# Altium PCB MG_V4(1).PcbDoc
Units mm, origin at the board's own origin, x right, y up, seen from the top; angles counter-clockwise.
Board outline 99.69 x 61.59 mm, 2 copper layers (Top Layer, Bottom Layer); 89 components, 106 nets, 399 pads, 95 vias.
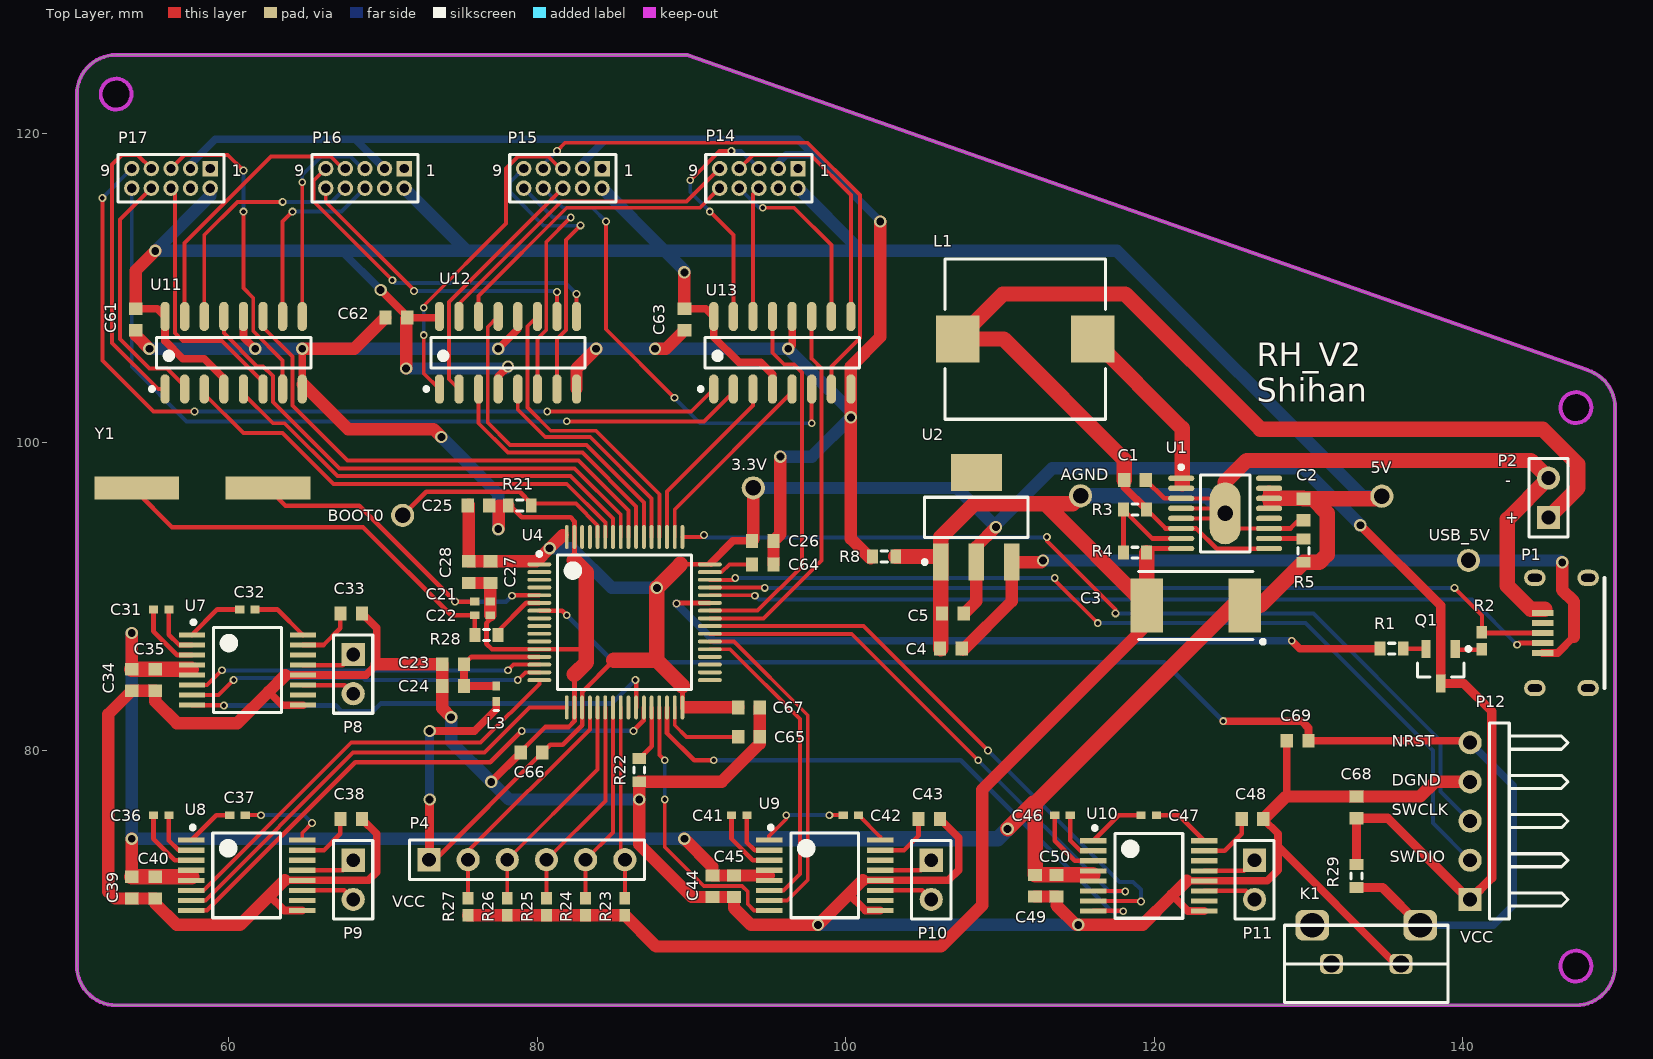
[diagram p0: Top Layer view]
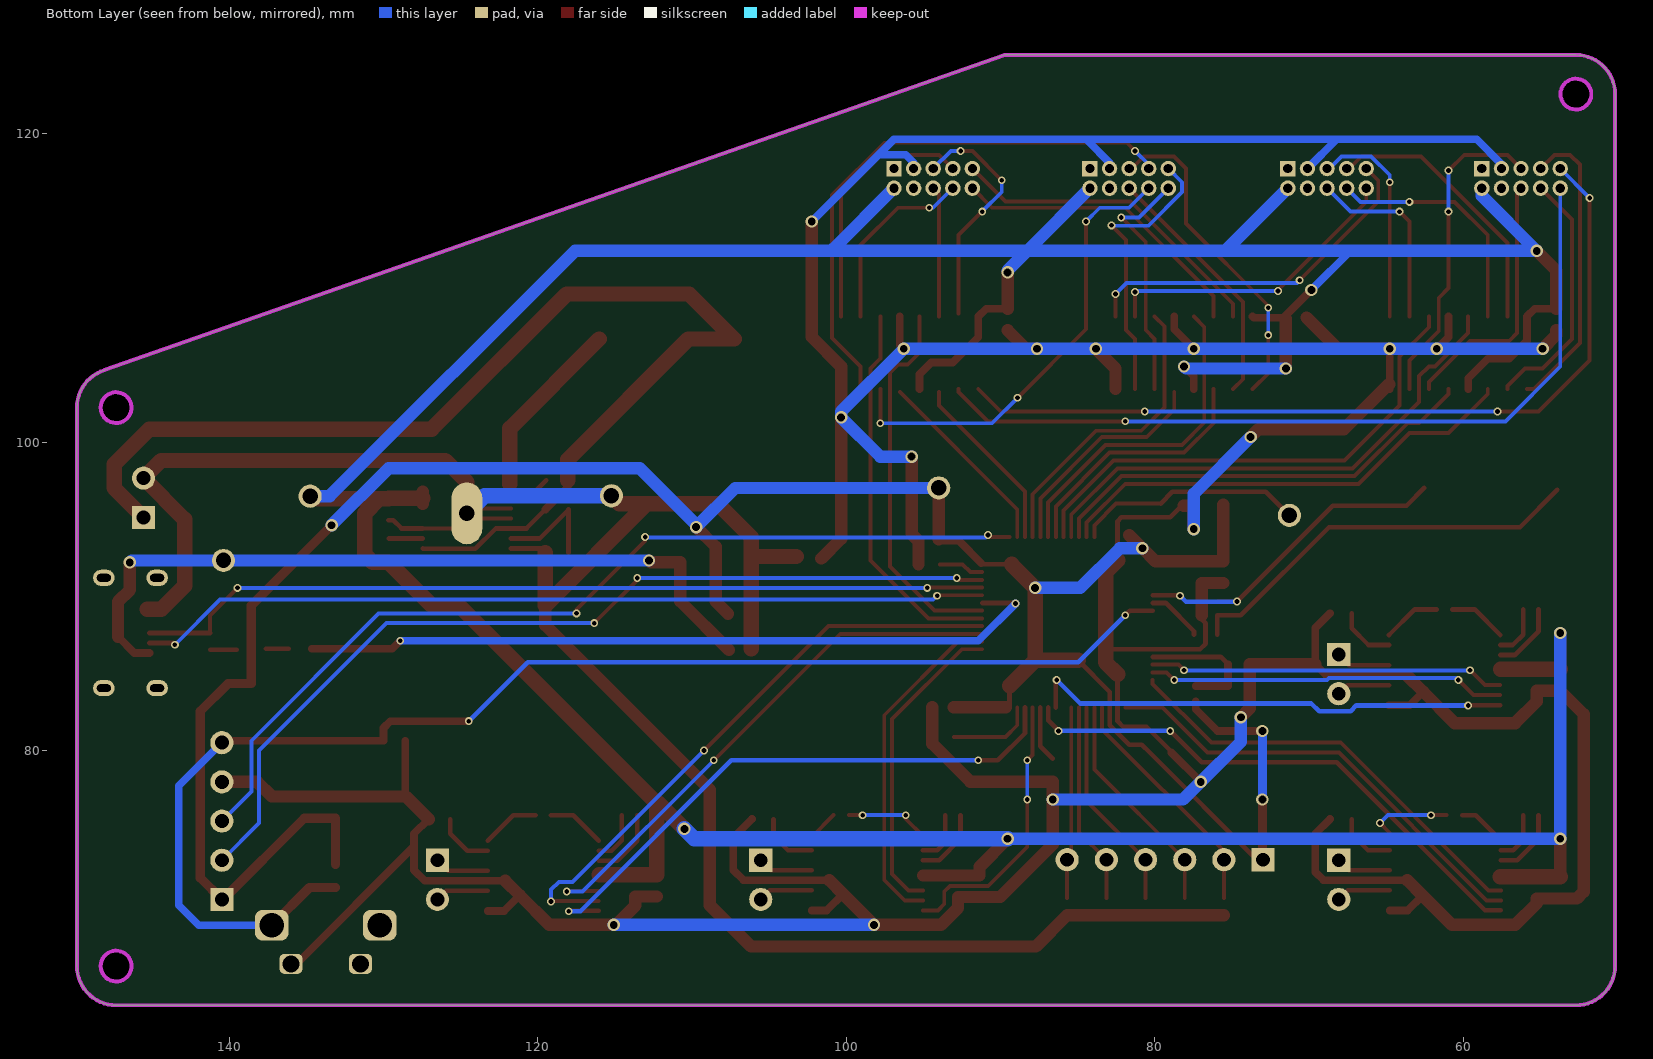
[diagram p1: Bottom Layer view, seen from below]

## Layer stack, top to bottom
Top Solder: solder mask 0.0102, Solder Resist, Dk 3.5
Top Layer: signal copper 0.0356
Dielectric 1: dielectric 0.32, FR-4, Dk 4.8
Bottom Layer: signal copper 0.0356
Bottom Solder: solder mask 0.0102, Solder Resist, Dk 3.5

## Board outline
50.165,66.04 50.165,122.555 cw(c52.705,122.555) 52.705,125.095 89.729,125.095 148.082,104.671 148.078,104.659 cw(c147.32,102.235) 149.86,102.235 149.86,66.04 cw(c147.32,66.04) 147.32,63.5 52.705,63.5 cw(c52.705,66.04)
cut-out: 146.32,102.235 ccw(c147.32,102.235) 147.32,101.235 ccw(c147.32,102.235) 148.32,102.235 ccw(c147.32,102.235) 147.32,103.235 ccw(c147.32,102.235)
cut-out: 146.32,66.04 ccw(c147.32,66.04) 147.32,65.04 ccw(c147.32,66.04) 148.32,66.04 ccw(c147.32,66.04) 147.32,67.04 ccw(c147.32,66.04)
cut-out: 52.705,121.555 cw(c52.705,122.555) 51.705,122.555 cw(c52.705,122.555) 52.705,123.555 cw(c52.705,122.555) 53.705,122.555 cw(c52.705,122.555)

## Design rules (kind name [scope] priority, off if disabled: settings)
Clearance [All] p1: gap=0.15
PolygonConnect [All] p1: connectstyle=Relief reliefconductorwidth=0.254 reliefentries=4 polygonreliefangle="90 Angle" airgapwidth=0.254
RoutingVias [All] p1: holewidth=0.5 width=0.8 viastyle="Through Hole" minholewidth=0.305 minwidth=0.508 maxholewidth=7 maxwidth=7
SolderMaskExpansion [All] p1: expansion=0.102
Width [All] p1: maxlimit=1 minlimit=0.15 preferedwidth=0.2
30 further rules are at their usual default settings.

## Classes and differential pairs
component class MCU1: BOOT0 C21 C22 C23 C24 C25 C26 C27 C28 C61 C62 C63 C64 C65 C66 C67 C68 C69 K1 L3 P4 P12 R21 R22 R23 R24 R25 R26 R27 R28 R29 U4 U11 U12 U13 Y1
component class MotorDrive1: C31 C32 C33 C34 C35 C36 C37 C38 C39 C40 C41 C42 C43 C44 C45 C46 C47 C48 C49 C50 P8 P9 P10 P11 U7 U8 U9 U10
component class PowerSupply1: 3.3V 5V AGND C1 C2 C3 C4 C5 L1 P1 P2 P14 P15 P16 P17 Q1 R1 R2 R3 R4 R5 R8 U1 U2 USB_5V

## Components (designator, comment, footprint, x,y, rotation, side; value= is the part's Value field where it differs from the comment)
3.3V "TP" TestPort 93.98,97.028 r90 top
5V "TP" TestPort 134.747,96.52 r0 top
AGND "TP" TestPort 115.189,96.52 r90 top
BOOT0 "TP" TestPort 71.247,95.25 r90 top
C1 "10uF" 1608[0603] 118.745,97.536 r180 top
C2 "2.2uF" 1608[0603] 129.667,95.631 r90 top
C3 "220uF" 6TPF220M5L 122.682,89.408 r180 top
C4 "10uF" 1608[0603] 106.807,86.614 r180 top
C5 "10uF" 1608[0603] 106.934,88.9 r180 top
C21 "20pF" 0402 76.454,89.662 r180 top
C22 "20pF" 0402 76.454,88.773 r180 top
C23 "1uF" 1608[0603] 74.549,85.598 r0 top
C24 "100nF" 1608[0603] 74.549,84.201 r0 top
C25 "100nF" 1608[0603] 76.2,95.885 r180 top
C26 "100nF" 1608[0603] 94.615,93.599 r180 top
C27 "100nF" 1608[0603] 76.962,91.567 r90 top
C28 "10uF" 1608[0603] 75.565,91.567 r90 top
C31 "0.1uF" 0402 55.626,89.154 r0 top
C32 "0.1uF" 0402 61.214,89.154 r0 top
C33 "0.01uF" 1608[0603] 67.945,88.9 r0 top
C34 "10uF" 1608[0603] 53.721,84.582 r270 top
C35 "0.1uF" 1608[0603] 55.245,84.582 r90 top
C36 "0.1uF" 0402 55.626,75.819 r0 top
C37 "0.1uF" 0402 60.579,75.819 r0 top
C38 "0.01uF" 1608[0603] 67.945,75.565 r0 top
C39 "10uF" 1608[0603] 53.721,71.12 r270 top
C40 "0.1uF" 1608[0603] 55.245,71.12 r90 top
C41 "0.1uF" 0402 93.091,75.819 r0 top
C42 "0.1uF" 0402 100.33,75.819 r0 top
C43 "0.01uF" 1608[0603] 105.41,75.565 r0 top
C44 "10uF" 1608[0603] 91.36,71.212 r270 top
C45 "0.1uF" 1608[0603] 92.757,71.212 r90 top
C46 "0.1uF" 0402 114.046,75.819 r0 top
C47 "0.1uF" 0402 119.634,75.819 r0 top
C48 "0.01uF" 1608[0603] 126.365,75.565 r0 top
C49 "10uF" 1608[0603] 112.268,71.247 r270 top
C50 "0.1uF" 1608[0603] 113.665,71.247 r90 top
C61 "100nF" 1608[0603] 53.975,107.95 r90 top
C62 "100nF" 1608[0603] 70.866,108.077 r0 top
C63 "100nF" 1608[0603] 89.535,107.95 r90 top
C64 "2.2uF" 1608[0603] 94.615,92.075 r0 top
C65 "2.2uF" 1608[0603] 93.726,80.899 r180 top
C66 "100nF" 1608[0603] 79.629,79.883 r0 top
C67 "100nF" 1608[0603] 93.726,82.804 r180 top
C68 "10uF" 1608[0603] 133.096,76.327 r270 top
C69 "0.1uF" 1608[0603] 129.286,80.645 r0 top
K1 "Header 2" Button 133.731,67.437 r180 top
L1 "6.8uH" B82464G4682M 111.633,106.68 r0 top
L3 "GZ1005D601TF" 0402-A 77.343,83.693 r90 top
P1 "Micro-USB" Micro-USB 145.161,87.63 r90 top
P2 "Header 2" HDR1X2 145.542,95.123 r90 top
P4 "Header 6" HDR1X6 72.978,72.933 r0 top
P8 "Header 2" HDR1X2 68.072,86.233 r270 top
P9 "Header 2" HDR1X2 68.072,72.898 r270 top
P10 "Header 2" HDR1X2 105.537,72.898 r270 top
P11 "Header 2" HDR1X2 126.492,72.898 r270 top
P12 "Header 5H" HDR1X5H 140.462,70.358 r90 top
P14 "ENCODER_1" MHDR2X5 96.901,117.729 r180 top
P15 "ENCODER_2" MHDR2X5 84.201,117.729 r180 top
P16 "ENCODER_3" MHDR2X5 71.374,117.729 r180 top
P17 "ENCODER_4" MHDR2X5 58.801,117.729 r180 top
Q1 "PNP" SOT-23B_N 138.557,85.471 r270 top
R1 "10K" J1-0603 135.382,86.614 r0 top
R2 "1K" RES[0402] 141.224,87.122 r90 top
R3 "1M" J1-0603 118.745,95.631 r0 top
R4 "240K" J1-0603 118.745,92.837 r180 top
R5 "100K" J1-0603 129.667,92.964 r270 top
R8 "0K" J1-0603 102.489,92.583 r180 top
R21 "10K" J1-0603 78.867,95.885 r180 top
R22 "10K" J1-0603 86.614,78.74 r270 top
R23 "10K" RES[0402] 85.678,69.885 r270 top
R24 "10K" RES[0402] 83.138,69.885 r270 top
R25 "10K" RES[0402] 80.598,69.885 r270 top
R26 "10K" RES[0402] 78.058,69.885 r270 top
R27 "10K" RES[0402] 75.518,69.885 r270 top
R28 "0K" J1-0603 76.708,87.503 r0 top
R29 "10K" J1-0603 133.096,71.882 r90 top
U1 "TPS6103" TI_PWP_G16 124.587,95.377 r0 top
U2 "LM1117MPX-3.3" SOT230-4N 108.458,95.123 r90 top
U4 "STM32F405RGT6" STM32F405RGT6 80.137,92.075 r0 top
U7 "MPC17511EV" MPC_motor_drive 61.214,85.217 r0 top
U8 "MPC17511EV" MPC_motor_drive 61.167,71.917 r0 top
U9 "MPC17511EV" MPC_motor_drive 98.632,71.917 r0 top
U10 "MPC17511EV" MPC_motor_drive 119.634,71.882 r0 top
U11 "AM26C32CD" D16_L 60.325,105.791 r90 top
U12 "AM26C32CD" D16_L 78.105,105.791 r90 top
U13 "AM26C32CD" D16_L 95.885,105.791 r90 top
USB_5V "TP" TestPort 140.335,92.329 r90 top
Y1 "XTAL" Crystal_HCM49 58.293,97.028 r180 top

## Footprints (in the part's own frame and the unit in brackets; to place one, negate y for a bottom-side part, rotate by r counter-clockwise, add the part's x,y. Pads: shape width x height; smd on the part's side, far side on the other; paste and mask are expansions set on the pad)
6TPF220M5L [mm] "Molded Capacitor, 2-Leads, Body 7.3x4.3mm, IPC Medium Density"
  rect 2.1x3.5 smd: 1(-3.175,0) 2(3.175,0)
  silkscreen extent -4.47,-2.2 3.7,2.47, body extent -3.65,-2.15 3.65,2.15, height 2.8
0402 [mm] "Chip Capacitor, Body 1.0x0.5mm, IPC High Density"
  rect 0.6x0.5 smd: 1(-0.5,0) 2(0.5,0)
  body extent -0.55,-0.3 0.55,0.3, height 1.3
0402-A [mm] "Chip Inductor, Body 1.0x0.5mm, IPC High Density"
  rect 0.6x0.5 smd: 1(-0.5,0) 2(0.5,0)
  silkscreen extent -1.1,-0.15 -1.1,0.15, body extent -0.55,-0.3 0.55,0.3, height 0.55
1608[0603] [mm] "Chip Capacitor, Body 1.6x0.8mm, IPC High Density"
  rect 0.8x0.9 smd: 1(-0.7,0) 2(0.7,0)
  body extent -0.87,-0.48 0.87,0.48, height 1.3
B82464G4682M [mm] "Precision Wire Wound Inductor, 2-Leads, Body 10.4x10.4mm, IPC Medium Density"
  rect 2.8x3.05 smd: 1(-4.375,0) 2(4.375,0)
  silkscreen extent -5.2,-5.2 5.2,5.2, body extent -5.2,-5.2 5.2,5.2, height 4.8
Button [mm] "4 pads"
  rrect50% 2.2x2 hole 1.6: 1(-3.5,-1.25) 4(3.5,-1.25)
  rrect50% 1.5x1.3 hole 1.1: 2(-2.25,1.25) 3(2.25,1.25)
  silkscreen extent -5.3,-1.25 5.3,3.75
Crystal_HCM49 [mm]
  rect 5.5x1.5 smd: 1(-4.25,0) 2(4.25,0)
D16_L [mm] "SOIC, 16-Leads, Body 9.9x3.9mm, Pitch 1.27mm, IPC High Density"
  oval 1.9x0.6 smd: 1(-2.35,4.445) 2(-2.35,3.175) 3(-2.35,1.905) 4(-2.35,0.635) 5(-2.35,-0.635) 6(-2.35,-1.905) 7(-2.35,-3.175) 8(-2.35,-4.445) 9(2.35,-4.445) 10(2.35,-3.175) 11(2.35,-1.905) 12(2.35,-0.635) 13(2.35,0.635) 14(2.35,1.905) 15(2.35,3.175) 16(2.35,4.445)
  silkscreen extent -2.47,-5 1,5.42, body extent -1.99,-5 1.99,5, height 1.75
HDR1X2 [mm] "Connector; Header; 2 Position"
  rect 1.5x1.5 hole 0.9: 1(0,0)
  round 1.5 hole 0.9: 2(2.54,0)
  silkscreen extent -1.27,-1.27 3.81,1.27
HDR1X5H [mm] "Connector; Header; 5 Position; Right Angle"
  rect 1.5x1.5 hole 0.9: 1(0,0)
  round 1.5 hole 0.9: 2(2.54,0) 3(5.08,0) 4(7.62,0) 5(10.16,0)
  silkscreen extent -1.27,-6.35 11.43,-1.27
HDR1X6 [mm] "Connector; Header; 6 Position"
  rect 1.5x1.5 hole 0.9: 1(0,0)
  round 1.5 hole 0.9: 2(2.54,0) 3(5.08,0) 4(7.62,0) 5(10.16,0) 6(12.7,0)
  silkscreen extent -1.27,-1.27 13.97,1.27
J1-0603 [mm] "Chip Resistor, Body 1.6x0.8mm, IPC High Density"
  rect 0.7x0.9 smd: 1(-0.75,0) 2(0.75,0)
  silkscreen extent -0.2,-0.35 0.2,0.35, body extent -0.85,-0.48 0.85,0.48, height 0.9
MHDR2X5 [mm] "Connector; Header; 5x2 Position"
  rect 1x1 hole 0.6: 1(0,0)
  round 1 hole 0.6: 2(0,1.27) 3(1.27,0) 4(1.27,1.27) 5(2.54,0) 6(2.54,1.27) 7(3.81,0) 8(3.81,1.27) 9(5.08,0) 10(5.08,1.27)
  silkscreen extent -0.9,-0.9 5.98,2.17
Micro-USB [mm]
  oval 1.05x1.4 hole 0.5 slot 0.9 at 90 deg: 0(-3.575,-2.95) 0(-3.575,0.5) 0(3.575,-2.95) 0(3.575,0.5)
  rect 0.4x1.4 smd: 1(-1.3,0) 2(-0.65,0) 3(0,0) 4(0.65,0) 5(1.3,0)
  silkscreen extent -3.56,-4 3.56,-4
MPC_motor_drive [mm]
  rect 1.7x0.33 smd: 1(-3.597,2.281) 2(-3.597,1.631) 3(-3.597,0.981) 4(-3.597,0.331) 5(-3.597,-0.319) 6(-3.597,-0.969) 7(-3.597,-1.619) 8(-3.597,-2.269) 9(3.603,-2.269) 10(3.603,-1.619) 11(3.603,-0.969) 12(3.603,-0.319) 13(3.603,0.331) 14(3.603,0.981) 15(3.603,1.631) 16(3.603,2.281)
  silkscreen extent -3.62,-2.74 2.2,3.23, body extent -2.6,-2.74 2.6,2.76, height 2.05
RES[0402] [mm] "Chip Resistor, 2-Leads, Body 1.0x0.5mm, IPC Medium Density"
  rect 0.8x0.7 smd: 1(-0.55,0) 2(0.55,0)
  body extent -0.55,-0.3 0.55,0.3, height 0.6
SOT230-4N [mm] "SOT223, 4-Leads, Body 6.7x7.3mm (max), Pitch 2.30mm, IPC Medium Density"
  rect 2.4x1 smd: 1(-2.9,2.3) 2(-2.9,0) 3(-2.9,-2.3)
  rect 2.4x3.3 smd: 4(2.9,0)
  silkscreen extent -3.02,-3.35 1.3,3.47, body extent -1.85,-3.35 1.85,3.35, height 1.8
SOT-23B_N [mm] "SOT23, 3-Leads, Body 2.9x1.3mm, Pitch 0.95mm, Lead Span 2.4mm, IPC Medium Density"
  rect 1.15x0.6 smd: 1(-1.125,0.95) 2(-1.125,-0.95) 3(1.125,0)
  silkscreen extent -1.25,-1.5 0.7,1.93, body extent -0.7,-1.5 0.7,1.5, height 1.14
STM32F405RGT6 [mm] "IC MCU 32BIT 1MB FLASH 64LQFP"
  oval 1.55x0.25 smd: 1(0,0) 2(0,-0.5) 3(0,-1) 4(0,-1.5) 5(0,-2) 6(0,-2.5) 7(0,-3) 8(0,-3.5) 9(0,-4) 10(0,-4.5) 11(0,-5) 12(0,-5.5) 13(0,-6) 14(0,-6.5) 15(0,-7) 16(0,-7.5) 33(11.05,-7.5) 34(11.05,-7) 35(11.05,-6.5) 36(11.05,-6) 37(11.05,-5.5) 38(11.05,-5) 39(11.05,-4.5) 40(11.05,-4) 41(11.05,-3.5) 42(11.05,-3) 43(11.05,-2.5) 44(11.05,-2) 45(11.05,-1.5) 46(11.05,-1) 47(11.05,-0.5) 48(11.05,0)
  oval 0.25x1.55 smd: 17(1.775,-9.275) 18(2.275,-9.275) 19(2.775,-9.275) 20(3.275,-9.275) 21(3.775,-9.275) 22(4.275,-9.275) 23(4.775,-9.275) 24(5.275,-9.275) 25(5.775,-9.275) 26(6.275,-9.275) 27(6.775,-9.275) 28(7.275,-9.275) 29(7.775,-9.275) 30(8.275,-9.275) 31(8.775,-9.275) 32(9.275,-9.275) 49(9.275,1.775) 50(8.775,1.775) 51(8.275,1.775) 52(7.775,1.775) 53(7.275,1.775) 54(6.775,1.775) 55(6.275,1.775) 56(5.775,1.775) 57(5.275,1.775) 58(4.775,1.775) 59(4.275,1.775) 60(3.775,1.775) 61(3.275,1.775) 62(2.775,1.775) 63(2.275,1.775) 64(1.775,1.775)
  silkscreen extent -0.12,-8.1 9.87,0.8, body extent 0.53,-8.75 10.53,1.25, height 1.6
TestPort [mm]
  round 1.5 hole 1: 0(0,-0.025)
TI_PWP_G16 [mm]
  oval 1.7x0.35 smd: 1(-2.85,2.275) 2(-2.85,1.625) 3(-2.85,0.975) 4(-2.85,0.325) 5(-2.85,-0.325) 6(-2.85,-0.975) 7(-2.85,-1.625) 8(-2.85,-2.275) 9(2.85,-2.275) 10(2.85,-1.625) 11(2.85,-0.975) 12(2.85,-0.325) 13(2.85,0.325) 14(2.85,0.975) 15(2.85,1.625) 16(2.85,2.275)
  oval 2x4 hole 1: 3(0,0)
  Top Layer lines w0.254: -2.85,-0.325 -0.762,-0.325 ; -2.85,0.325 -0.945,0.325 -0.762,0.508 ; -2.85,0.975 -0.803,0.975 -0.762,1.016 ; 0.508,-1.016 0.549,-0.975 2.85,-0.975
  silkscreen extent -2.97,-2.5 1.6,3.12

## Part data
3.3V 5V AGND BOOT0 USB_5V: library part TestPoint
C1 C2 C4 C5 C21 C22 C23 C24 C25 C26 C27 C28 C35 C40 C45 C50 C61 C62 C63 C64 C65 C66 C67 C68 C69: library part Cap, "Capacitor"
C3 C31 C32 C33 C34 C36 C37 C38 C39 C41 C42 C43 C44 C46 C47 C48 C49: library part "Cap Pol1", "Polarized Capacitor (Radial)"
K1 P2 P8 P9 P10 P11: "Header, 2-Pin"
L1 L3: library part Inductor, "Inductor"
P4: "Header, 6-Pin"
P12: "Header, 5-Pin, Right Angle"
P14 P15 P16 P17: library part "Header 5X2", "Header, 5-Pin, Dual row"
Q1: "PNP Bipolar Transistor"
R1 R2 R3 R4 R5 R8 R21 R22 R23 R24 R25 R26 R27 R28: library part Res1, "Resistor"
R29: library part Res3, "Resistor"
U2: "800mA Low-Dropout Linear Regulator, 4-pin SOT-223"
U4: "IC MCU 32BIT 1MB FLASH 64LQFP"
U7 U8 U9 U10: "IC MOTOR DRIVER PAR 16VMFP"
U11 U12 U13: "Quadruple Differential Line Receiver, 0 TX / 4 RX, 5V, 0 to 70 degC, 16-Pin SOIC(D), Green (RoHS & no Sb/Br)"
Y1: "Crystal Oscillator"

## Via types
v1: diameter 0.508, hole 0.305, Top Layer to Bottom Layer, 61 vias
v2: diameter 0.8, hole 0.508, Top Layer to Bottom Layer, 34 vias

## Nets (pads, with @x,y where several pads share a name; then routed paths per layer and width w, separated by ;. In a path a pad name is that pad's centre, name@x,y a point inside that pad or via, vN(x,y) a via of type N, cw(c..) or ccw(c..) an arc to the next point about the centre after c; other vN are vias at no path point)
5V: 5V.0 C2.2 C3.1 C34.1 C35.2 C39.1 C40.2 C44.1 C45.2 C49.1 C50.2 C61.2 C62.2 C63.2 P14.2 P15.2 P16.2 P17.2 R5.2 U1.13 U1.14 U1.15 U7.4 U7.5 U8.4 U8.5 U9.4 U9.5 U10.4 U10.5 U11.4 U11.16 U12.4 U12.16 U13.4 U13.16 | length 293.6
  Top Layer w0.5: C61.2 55.371,108.65 U11.16 55.88,106.553 57.023,105.41 58.42,105.41 59.69,104.14 U11.4 ; v2(69.85,109.855) C62.2@71.566,108.139 ; C62.2@71.566,108.058 73.577,108.058 U12.16 ; U12.4 77.47,104.267 v2(78.105,104.902) ; C63.2 90.931,108.65 U13.16 91.44,106.807 93.091,105.156 94.488,105.156 95.25,104.394 U13.4
  Top Layer w0.8: C39.1 v2(53.721,74.295) ; C34.1 v2(53.721,87.63) ; C61.2 53.975,111.125 v2(55.245,112.395) ; v2(71.501,104.775) C62.2@71.501,107.993 ; v2(89.535,74.295) 91.36,72.47 C44.1 95.026,71.912 ; C63.2 v2(89.535,110.998) ; 127.437,96.012 U1.14 127.437,96.774
  Top Layer w1: C39.1 57.596,71.82 ; C34.1 57.593,85.282 ; v2(110.49,74.93) 112.141,76.581 112.268,76.581 ; 116.013,71.947 C49.1 112.268,76.581 ; U1.14 C2.2@129.646,96.352 ; C2.2 130.237,96.331 ; 5V.0 134.583,96.331 130.237,96.331 ; 112.268,76.581 125.095,89.408 C3.1 126.861,89.408 R5.2 130.695,92.214 131.191,92.71 131.191,95.377 130.237,96.331
  Bottom Layer w0.5: 67.31,112.395 v2(69.85,109.855)
  Bottom Layer w0.8: v2(53.721,87.63) v2(53.721,74.295) v2(89.535,74.295) ; P17.2 58.801,115.951 v2(55.245,112.395) 67.31,112.395 75.438,112.395 ; P16.2 75.438,112.395 ; v2(71.501,104.775) 77.978,104.775 v2(78.105,104.902) ; P15.2 88.265,112.395 ; v2@89.535,111.125 88.265,112.395 ; P14.2 100.838,112.522 ; 5V.0 133.477,96.495 117.577,112.395 88.265,112.395 ; 75.438,112.395 88.265,112.395
  Bottom Layer w1: v2(89.535,74.295) 89.538,74.298 109.858,74.298 v2(110.49,74.93)
AGND: AGND.0 C1.1 C2.1 C3.2 C4.2 C5.2 P1.5 P2.2 R4.1 R8.1 R23.2 R24.2 R25.2 R26.2 R27.2 U1.3 U1.4 U1.5 U1.8 U1.11 U2.1 | length 144.4
  Top Layer w0.3: C1.1 120.629,96.352 U1.3@121.737,96.352 ; R4.1 119.76,93.102 U1.8 ; U1.11 128.819,94.402 129.348,94.931 C2.1
  Top Layer w0.8: R27.2 R26.2 R25.2 R24.2 R23.2 87.703,67.31 106.172,67.31 108.839,69.977 108.839,77.47 119.507,88.138 C3.2
  Top Layer w1: R8.1 U2.1@105.798,92.583 ; C4.2@106.158,86.614 U2.1 106.158,93.839 108.331,96.012 112.903,96.012 ; AGND.0 114.706,96.012 112.903,96.012 ; R4.1 C3.2@119.495,89.42 ; C3.2 C3.2@119.495,89.42 ; U1.3@124.587,95.377 124.587,97.409 125.984,98.806 144.399,98.806 P2.2 142.875,94.996 142.875,90.678 144.399,89.154 145.288,89.154 ; 112.903,96.012 C3.2@119.495,89.42
  Bottom Layer w1: AGND.0 123.444,96.52 U1.3@124.587,95.377
BOOT0: BOOT0.0 R21.1 U4.60 | length 14.9
  Top Layer w0.254: R21.1@79.617,96.012 82.501,96.012 83.912,94.601 U4.60
  Top Layer w0.3: BOOT0.0 72.796,96.774 78.855,96.774 R21.1@79.617,96.012
BOOT1: R22.1 U4.28 | length 3.6
  Top Layer w0.3: R22.1 87.412,80.288 U4.28
DGND: C21.1 C22.1 C23.1 C24.1 C25.1 C26.1 C27.1 C28.1 C33.2 C34.2 C35.1 C38.2 C39.2 C40.1 C43.2 C44.2 C45.1 C48.2 C49.2 C50.1 C61.1 C62.1 C63.1 C64.2 C65.1 C66.1 C67.1 C68.1 C69.1 K1.2 P12.4 P14.3 P15.3 P16.3 P17.3 R8.2 R21.2 R22.2 U4.12 U4.18 U4.63 U7.9 U7.12 U8.9 U8.12 U9.9 U9.12 U10.9 U10.12 U11.8 U11.12 U12.8 U12.12 U13.8 U13.12 | length 424.5
  Top Layer w0.3: C22.1 76.954,88.511 76.708,88.265 76.708,86.933 77.066,86.575 U4.12 83.185,86.575 ; R21.2@78.244,95.885 79.006,95.123 82.169,95.123 82.412,94.88 U4.63 82.412,92.329 ; C66.1@78.898,79.914 80.518,81.534 82.042,81.534 82.412,81.904 U4.18 82.412,84.952
  Top Layer w0.5: U11.12 60.96,106.807 v2(61.722,106.045) ; 62.596,83.82 63.468,82.948 U7.9 ; 62.641,70.612 63.605,69.648 U8.9 ; 63.627,71.598 69.058,71.598 69.596,72.136 69.596,74.614 C38.2 ; 63.674,84.898 U7.12 68.896,84.898 69.596,85.598 69.596,87.949 C33.2 ; U11.8 v2(64.77,106.045) ; v2(77.024,77.978) C66.1 ; v2(77.47,106.045) 78.74,107.315 U12.12 ; v2(96.266,106.045) 96.52,106.299 U13.12 ; 100.203,70.709 101.264,69.648 U9.9 ; 101.092,71.598 106.65,71.598 107.315,72.263 107.315,74.36 C43.2 ; 121.158,70.627 122.172,69.613 U10.9 ; 122.094,71.563 127.316,71.563 128.016,72.263 128.016,73.787 ; C48.2 128.016,74.614 128.016,73.787 ; 128.586,77.086 C69.1 ; K1.2 135.616,66.187 128.016,73.787
  Top Layer w0.8: C61.1 53.975,106.934 v2(54.864,106.045) ; 63.627,71.598 62.641,70.612 60.736,68.707 56.642,68.707 55.245,70.104 C40.1 C39.2 52.643,70.42 52.197,70.866 52.197,82.358 C34.2 C35.1 55.245,83.185 56.642,81.788 60.564,81.788 62.596,83.82 63.674,84.898 ; v2(64.77,106.045) 68.134,106.045 C62.1 ; U11.8@64.812,103.759 67.733,100.838 73.279,100.838 v2(73.787,100.33) ; 69.596,85.598 C23.1@73.66,85.598 ; C23.1 C24.1 73.849,82.742 v2(74.422,82.169) ; C28.1 C27.1 76.957,89.662 C22.1 ; v2@77.508,94.399 77.508,95.885 R21.2 ; U12.8 82.55,104.775 v2(83.82,106.045) ; v2(87.63,106.045) 88.33,106.045 C63.1 ; C67.1 C65.1 94.426,80.456 91.96,77.99 R22.2 86.614,73.914 90.016,70.512 C44.2 C45.1 92.757,69.803 93.853,68.707 v2(98.201,68.707) 100.203,70.709 101.092,71.598 ; C64.2 C26.1 95.758,94.042 v2(95.758,99.06) ; R8.2@101.612,92.456 100.33,93.738 v2(100.33,101.6) U13.8 100.33,104.902 102.235,106.807 v2(102.235,114.3) ; C49.2 C50.1 113.665,69.977 114.935,68.707 v2(115.062,68.707) 119.238,68.707 121.158,70.627 122.094,71.563 ; C48.2 128.527,77.027 C68.1 137.225,77.027 138.176,77.978 P12.4
  Top Layer w1: 82.412,84.952 83.185,85.725 83.185,91.556 82.412,92.329
  Bottom Layer w0.5: P17.3 57.531,118.025 59.14,119.634 68.202,119.634 ; P16.3@70.104,117.732 68.202,119.634 ; P15.3 82.931,118.11 84.347,119.526 ; P14.3 95.631,118.11 96.15,118.629 97.906,118.629 ; v2(102.235,114.3) 97.906,118.629 ; 68.202,119.634 96.901,119.634 97.906,118.629
  Bottom Layer w0.8: v2(54.864,106.045) v2(61.722,106.045) v2(64.77,106.045) v2(77.47,106.045) v2(83.82,106.045) v2(87.63,106.045) v2(96.266,106.045) 100.33,101.981 v2(100.33,101.6) 97.79,99.06 v2(95.758,99.06) ; v2(73.787,100.33) 77.47,96.647 v2(77.47,94.361) ; v2(74.422,82.169) 74.422,80.58 v2(77.024,77.978) 78.167,76.835 v2(86.614,76.835) ; v2(98.201,68.707) v2(115.062,68.707)
DRIVE_5V: C1.2 L1.1 P2.1 R3.2 U1.6 U1.9 | length 77.1
  Top Layer w0.3: R3.2 120.724,94.402 U1.6 122.724,94.402 124.049,93.077 127.412,93.077 U1.9
  Top Layer w0.5: C1.2 118.045,97.081 R3.2
  Top Layer w1: C1.2 118.045,98.871 110.236,106.68 L1.1 110.179,109.601 118.11,109.601 126.873,100.838 145.161,100.838 147.447,98.552 147.447,97.028 P2.1
DVDD+3.3V: 3.3V.0 C5.1 C25.2 C26.2 C27.2 C28.2 C66.2 C67.2 C68.2 L3.1 P4.1 P12.1 Q1.3 R29.2 U2.2 U4.1 U4.19 U4.32 U4.48 U4.64 | length 168
  Top Layer w0.3: P4.1 73.379,72.933 C66.2 80.837,80.391 81.661,80.391 82.912,81.642 U4.19 82.912,83.801 84.963,85.852 ; 89.281,92.075 U4.48 ; U4.32 89.412,84.197
  Top Layer w0.5: v2(73.025,81.28) 75.938,81.28 77.343,82.685 L3.1 ; U4.48@91.238,92.151 92.686,93.599 C26.2
  Top Layer w0.6: P4.1 73.025,72.98 v2(73.025,76.835) ; R29.2 C68.2 135.128,75.627 140.397,70.358 P12.1 141.859,71.755 141.859,82.55 140.063,84.346 Q1.3 138.557,89.408 v2(133.35,94.615)
  Top Layer w0.8: C25.2@75.565,95.947 C28.2 C27.2 79.948,92.267 v2(80.805,93.124) 81.661,93.98 ; 89.662,82.804 C67.2 ; C26.2@94.005,93.689 3.3V.0 ; C5.1@107.659,88.875 108.458,89.674 U2.2 108.458,93.218 v2(109.728,94.488)
  Top Layer w1: 84.963,85.852 87.757,85.852 ; 89.281,92.075 v2(87.757,90.551) 87.757,85.852 ; 89.412,84.197 87.757,85.852
  Bottom Layer w0.6: v2(73.025,76.835) v2(73.025,81.28)
  Bottom Layer w0.8: v2(80.805,93.124) 82.263,93.124 84.836,90.551 v2(87.757,90.551) ; 3.3V.0 107.188,97.028 v2(109.728,94.488) 109.728,94.65 113.376,98.298 129.667,98.298 v2(133.35,94.615)
ENCODER_1_A: U4.42 U13.13 | length 24.5
  Top Layer w0.254: U4.42 94.282,89.075 97.155,91.948 97.155,104.521 96.647,105.029 96.012,105.029 95.25,105.791 U13.13
ENCODER_1_B: U4.41 U13.11 | length 24.9
  Top Layer w0.254: U4.41 94.671,88.575 98.425,92.329 98.425,104.775 97.79,105.41 U13.11
ENCODER_1_Z: U4.54 U12.13 | length 21.7
  Top Layer w0.254: U12.13 76.793,107.464 76.793,101.261 78.232,99.822 83.185,99.822 86.912,96.095 U4.54
ENCODER_2_A: U4.55 U12.3 | length 16.6
  Top Layer w0.254: U12.3 76.2,101.219 78.105,99.314 82.931,99.314 86.412,95.833 U4.55
ENCODER_2_B: U4.50 U13.5 | length 12.5
  Top Layer w0.254: U4.50 88.912,95.637 U13.5@96.52,103.245
ENCODER_2_Z: U4.53 U12.5 | length 14.7
  Top Layer w0.254: U12.5@78.74,103.245 78.74,102.108 80.518,100.33 83.439,100.33 87.412,96.357 U4.53
ENCODER_3_A: U4.56 U11.11 | length 32.9
  Top Layer w0.254: U11.11 62.23,107.442 64.135,105.537 64.135,102.362 67.691,98.806 82.677,98.806 85.912,95.571 U4.56
ENCODER_3_B: U4.57 U11.13 | length 34.1
  Top Layer w0.254: U11.13 59.69,107.061 61.849,104.902 62.235,104.902 62.865,104.272 62.865,102.61 67.177,98.298 82.423,98.298 85.412,95.309 U4.57
ENCODER_3_Z: U4.52 U12.11 | length 19.8
  Top Layer w0.254: U12.11 79.375,107.506 79.375,102.235 80.876,100.734 83.797,100.734 87.912,96.619 U4.52
ENCODER_4_A: U4.58 U11.5 | length 28.8
  Top Layer w0.254: U11.5 60.96,103.124 62.865,101.219 63.627,101.219 67.056,97.79 82.169,97.79 84.912,95.047 U4.58
ENCODER_4_B: U4.59 U11.3 | length 30.7
  Top Layer w0.254: U11.3 58.42,103.124 60.96,100.584 63.5,100.584 66.802,97.282 81.915,97.282 84.412,94.785 U4.59
ENCODER_4_Z: U4.51 U13.3 | length 11.7
  Top Layer w0.254: U4.51 88.412,96.794 93.98,102.362 U13.3@93.98,103.245
FIN1: P4.6 R23.1 U4.24 | length 12.5
  Top Layer w0.254: U4.24 85.412,73.199 P4.6 R23.1
FIN2: P4.5 R24.1 U4.23 | length 13.1
  Top Layer w0.254: R24.1 P4.5 84.912,74.707 U4.23
FIN3: P4.4 R25.1 U4.22 | length 13.9
  Top Layer w0.254: R25.1 P4.4 84.412,76.747 U4.22
FIN4: P4.3 R26.1 U4.21 | length 14.8
  Top Layer w0.254: R26.1 P4.3 83.912,78.787 U4.21
FIN5: P4.2 R27.1 U4.20 | length 15.6
  Top Layer w0.254: R27.1 P4.2 75.518,73.486 83.412,81.38 U4.20
MOTOR_1_A: U4.14 U7.6 | length 23
  Top Layer w0.254: U7.6 58.594,84.248 v1(59.563,85.217) ; v1(78.105,85.217) 78.463,85.575 U4.14
  Bottom Layer w0.254: v1@59.597,85.183 v1@78.071,85.183
  Bottom Layer w0.3: v1(59.563,85.217) v1@59.597,85.183
MOTOR_1_A+: P14.6 U13.14 | length 8.5
  Top Layer w0.254: U13.14 93.98,116.078 P14.6
MOTOR_1_A-: P14.5 U13.15 | length 15.5
  Top Layer w0.254: v1(89.916,116.967) 91.821,118.872 v1(92.583,118.872) ; v1(91.186,114.935) 92.71,113.411 U13.15@92.71,108.337
  Bottom Layer w0.254: v1(89.916,116.967) 89.916,116.205 v1(91.186,114.935) ; v1(92.583,118.872) 93.218,118.872 P14.5
MOTOR_1_B: U4.15 U7.7 | length 23.1
  Top Layer w0.254: U7.7 59.341,83.598 v1(60.325,84.582) ; v1(78.74,84.582) 79.233,85.075 U4.15
  Bottom Layer w0.254: v1@60.463,84.72 68.696,84.72 68.834,84.582 v1(78.74,84.582)
MOTOR_1_B+: P14.8 U13.10 | length 12.1
  Top Layer w0.254: v1(94.615,115.189) 96.647,115.189 99.06,112.776 U13.10
  Bottom Layer w0.254: P14.8 94.361,115.189 v1(94.615,115.189)
MOTOR_1_B-: P14.7 U13.9 | length 16.6
  Top Layer w0.254: P14.7 93.98,118.618 97.727,118.618 100.33,116.015 U13.9
MOTOR_1_Z+: P14.10 U12.14 | length 19.8
  Top Layer w0.254: U12.14 76.2,109.474 81.915,115.189 90.551,115.189 P14.10
MOTOR_1_Z-: P14.9 U12.15 | length 21.3
  Top Layer w0.254: U12.15 74.93,108.966 81.557,115.593 89.685,115.593 P14.9
MOTOR_2_A: U4.16 U8.6 | length 28.4
  Top Layer w0.254: U8.6 58.375,70.948 67.945,80.518 76.327,80.518 80.137,84.328 U4.16
MOTOR_2_A+: P15.6 U12.2 | length 16.3
  Top Layer w0.254: U12.2 74.295,104.076 74.295,109.093 P15.6
MOTOR_2_A-: P15.5 U12.1 | length 21.2
  Top Layer w0.254: v1(72.644,106.934) 72.644,104.457 U12.1 ; v1(72.644,108.712) 72.644,108.839 77.978,114.173 77.978,117.729 78.755,118.506 80.713,118.506 81.49,117.729 P15.5
  Bottom Layer w0.254: v1(72.644,106.934) v1(72.644,108.712)
MOTOR_2_B: U4.17 U8.7 | length 29.5
  Top Layer w0.254: U8.7 58.487,70.298 68.072,79.883 76.581,79.883 79.498,82.8 U4.17
MOTOR_2_B+: P15.8 U13.6 | length 30
  Top Layer w0.254: v1(84.455,114.3) 84.455,107.315 v1(88.9,102.87) ; v1(97.79,101.219) U13.6
  Bottom Layer w0.254: P15.8 81.661,115.189 83.566,115.189 v1(84.455,114.3) ; v1(88.9,102.87) 90.551,101.219 v1(97.79,101.219)
MOTOR_2_B-: P15.7 U13.7 | length 36.1
  Top Layer w0.254: v1(81.28,118.872) 81.811,119.403 97.513,119.403 100.907,116.009 100.907,106.749 99.06,104.902 U13.7
  Bottom Layer w0.254: P15.7 80.391,117.983 v1(81.28,118.872)
MOTOR_2_Z+: P15.10 U12.6 | length 15.8
  Top Layer w0.254: U12.6 80.01,106.675 80.587,107.252 80.587,112.972 v1(82.169,114.554)
  Bottom Layer w0.254: P15.10 81.026,114.554 v1(82.169,114.554)
MOTOR_2_Z-: P15.9 U12.7 | length 18.6
  Top Layer w0.254: U12.7 81.28,106.675 81.857,107.252 81.857,113.099 v1(82.804,114.046)
  Bottom Layer w0.254: P15.9 78.232,116.84 78.232,116.205 80.414,114.023 82.781,114.023 v1(82.804,114.046)
MOTOR_3_A: U4.37 U9.6 | length 20.2
  Top Layer w0.254: U4.37 92.495,86.575 97.028,82.042 97.028,72.009 95.967,70.948 U9.6
MOTOR_3_A+: P16.6 U11.10 | length 12.4
  Top Layer w0.254: U11.10 63.5,114.3 v1(64.135,114.935)
  Bottom Layer w0.254: v1(64.135,114.935) 67.31,114.935 P16.6
MOTOR_3_A-: P16.5 U11.9 | length 14
  Top Layer w0.254: U11.9 v1(64.77,116.84)
  Bottom Layer w0.254: v1(64.77,116.84) 64.77,117.304 65.972,118.506 67.886,118.506 68.663,117.729 P16.5
MOTOR_3_B: U4.38 U9.7 | length 22
  Top Layer w0.254: U4.38 92.757,87.075 97.536,82.296 97.536,71.628 96.206,70.298 U9.7
MOTOR_3_B+: P16.8 U11.14 | length 15.7
  Top Layer w0.254: U11.14 58.42,113.411 60.579,115.57 v1(63.5,115.57)
  Bottom Layer w0.254: v1(63.5,115.57) 66.675,115.57 P16.8
MOTOR_3_B-: P16.7 U11.15 | length 17.6
  Top Layer w0.254: U11.15 57.15,112.903 62.753,118.506 66.616,118.506 P16.7@67.393,117.729
MOTOR_3_Z+: P16.10 U12.10 | length 19.9
  Top Layer w0.254: P16.10 66.294,115.57 72.009,109.855 v1(72.009,109.791) ; U12.10 v1(81.28,109.728)
  Bottom Layer w0.254: v1(72.009,109.791) 81.216,109.791 v1(81.28,109.728)
MOTOR_3_Z-: P16.9 U12.9 | length 23.4
  Top Layer w0.254: P16.9 65.517,116.952 65.517,115.585 v1(70.612,110.49) ; U12.9 v1(82.55,109.601)
  Bottom Layer w0.254: v1(70.612,110.49) 70.78,110.322 81.829,110.322 v1(82.55,109.601)
MOTOR_4_A: U4.39 U10.6 | length 35.9
  Top Layer w0.254: U4.39 100.385,87.575 v1(108.585,79.375) ; U10.6 v1@118.063,70.913
  Bottom Layer w0.254: v1(108.585,79.375) 117.094,70.866 v1(118.11,70.866)
MOTOR_4_A+: P17.6 U11.6 | length 17
  Top Layer w0.254: P17.6 56.515,116.205 56.515,107.061 57.023,106.553 59.563,106.553 62.23,103.886 U11.6
MOTOR_4_A-: P17.5 U11.7 | length 20.7
  Top Layer w0.254: P17.5 57.15,118.618 59.944,118.618 v1(60.96,117.602) ; v1(60.96,114.935) 60.96,109.982 61.595,109.347 61.595,107.188 63.5,105.283 U11.7
  Bottom Layer w0.254: v1(60.96,114.935) v1(60.96,117.602)
MOTOR_4_B: U4.40 U10.7 | length 38.8
  Top Layer w0.254: U4.40 101.155,88.075 v1(109.22,80.01) ; U10.7 v1@119.094,70.263
  Bottom Layer w0.254: v1(109.22,80.01) 117.729,71.501 118.618,71.501 119.126,70.993 v1(119.126,70.231)
MOTOR_4_B+: P17.8 U11.2 | length 16.3
  Top Layer w0.254: P17.8 52.959,114.427 52.959,106.68 54.864,104.775 56.012,104.775 57.15,103.637 U11.2
MOTOR_4_B-: P17.7 U11.1 | length 19.4
  Top Layer w0.254: P17.7 54.102,118.618 53.086,118.618 52.451,117.983 52.451,106.426 55.436,103.441 U11.1
MOTOR_4_Z+: P17.10 U13.2 | length 53
  Top Layer w0.254: v1(81.915,101.346) 90.811,101.346 92.71,103.245 U13.2
  Bottom Layer w0.254: P17.10 53.721,104.902 57.277,101.346 v1(81.915,101.346)
MOTOR_4_Z-: P17.9 U13.1 | length 54.8
  Top Layer w0.254: v1(51.816,115.824) 51.816,105.283 55.118,101.981 v1(57.785,101.981) ; v1(80.645,101.981) 89.98,101.981 U13.1
  Bottom Layer w0.254: v1(51.816,115.824) P17.9 ; v1(57.785,101.981) v1(80.645,101.981)
MOTOR_ENABLE_1: U4.26 U7.8 | length 31.5
  Top Layer w0.3: U7.8 v1@59.673,82.948 ; v1(86.36,84.582) 86.412,84.53 U4.26
  Bottom Layer w0.3: v1(59.69,82.931) 66.929,82.931 67.31,82.55 69.342,82.55 69.85,83.058 84.836,83.058 v1(86.36,84.582)
MOTOR_ENABLE_2: U4.27 U8.8 | length 35.3
  Top Layer w0.3: U8.8 58.599,69.648 68.199,79.248 76.962,79.248 v1(78.994,81.28) ; v1(86.233,81.28) 86.912,81.959 U4.27
  Bottom Layer w0.3: v1(78.994,81.28) v1(86.233,81.28)
MOTOR_ENABLE_3: U4.29 U9.8 | length 18.1
  Top Layer w0.254: U4.29 87.912,79.728 v1(88.265,79.375) ; v1(88.265,76.835) 88.265,73.765 90.795,71.235 93.276,71.235 93.645,70.866 93.645,70.058 94.055,69.648 U9.8
  Bottom Layer w0.254: v1(88.265,76.835) v1(88.265,79.375)
MOTOR_ENABLE_4: U4.30 U10.8 | length 37.9
  Top Layer w0.3: U4.30 88.412,81.133 90.17,79.375 v1(91.44,79.375) ; U10.8 v1@117.966,69.613
  Bottom Layer w0.3: v1(91.44,79.375) 107.442,79.375 117.221,69.596 v1(117.983,69.596)
NetC22_2: C22.2 R28.1 Y1.2 | length 26.7
  Top Layer w0.3: Y1.2@53.916,96.901 56.329,94.488 68.707,94.488 74.422,88.773 C22.2 R28.1@75.954,87.507
NetC31_1: C31.1 U7.3 | length 4.5
  Top Layer w0.3: C31.1 55.126,87.749 56.677,86.198 U7.3
NetC31_2: C31.2 U7.2 | length 3.4
  Top Layer w0.3: C31.2 56.126,87.511 56.789,86.848 U7.2
NetC32_1: C32.1 U7.1 | length 3.8
  Top Layer w0.3: U7.1 59.273,89.154 C32.1
NetC32_2: C32.2 U7.16 | length 3.8
  Top Layer w0.3: C32.2 63.161,89.154 U7.16
NetC33_1: C33.1 U7.15 | length 3.8
  Top Layer w0.3: U7.15 66.147,86.848 67.245,87.946 C33.1
NetC36_1: C36.1 U8.3 | length 4.6
  Top Layer w0.3: C36.1 55.126,74.287 56.515,72.898 U8.3
NetC36_2: C36.2 U8.2 | length 3.3
  Top Layer w0.3: C36.2 56.126,74.176 56.754,73.548 U8.2
NetC37_1: C37.1 U8.1 | length 3.2
  Top Layer w0.3: U8.1 59.191,75.819 C37.1
NetC37_2: C37.2 U8.16 | length 5.9
  Top Layer w0.254: C37.2 v1(62.103,75.819) ; U8.16 64.77,74.676 v1(65.405,75.311)
  Bottom Layer w0.254: v1(62.103,75.819) 64.897,75.819 v1(65.405,75.311)
NetC38_1: C38.1 U8.15 | length 3.9
  Top Layer w0.3: U8.15 66.182,73.548 67.245,74.611 C38.1
NetC41_1: C41.1 U9.3 | length 4.6
  Top Layer w0.3: C41.1 92.591,74.287 93.98,72.898 U9.3
NetC41_2: C41.2 U9.2 | length 3.4
  Top Layer w0.3: C41.2 93.591,74.049 94.092,73.548 U9.2
NetC42_1: C42.1 U9.1 | length 5.8
  Top Layer w0.254: U9.1 95.035,74.461 96.139,75.565 v1(96.139,75.819) ; v1(98.933,75.819) C42.1
  Bottom Layer w0.254: v1(96.139,75.819) 98.425,75.819 v1(98.933,75.819)
NetC42_2: C42.2 U9.16 | length 2.2
  Top Layer w0.254: C42.2 102.235,74.414 U9.16
NetC43_1: C43.1 U9.15 | length 3.9
  Top Layer w0.3: U9.15 103.774,73.548 104.71,74.484 C43.1
NetC46_1: C46.1 U10.3 | length 4.7
  Top Layer w0.3: C46.1 113.546,74.16 114.843,72.863 U10.3
NetC46_2: C46.2 U10.2 | length 3.4
  Top Layer w0.3: C46.2 114.546,74.176 115.209,73.513 U10.2
NetC47_1: C47.1 U10.1 | length 3.8
  Top Layer w0.3: U10.1 117.693,75.819 C47.1
NetC47_2: C47.2 U10.16 | length 3.8
  Top Layer w0.3: C47.2 121.581,75.819 U10.16
NetC48_1: C48.1 U10.15 | length 3.8
  Top Layer w0.3: U10.15 124.567,73.513 125.665,74.611 C48.1
NetC64_1: C64.1 U4.47 | length 2.9
  Top Layer w0.254: U4.47 91.956,91.575 92.456,92.075 C64.1
NetC65_2: C65.2 U4.31 | length 5.6
  Top Layer w0.254: U4.31 88.912,81.649 89.662,80.899 C65.2
NetL1_2: L1.2 U1.1 U1.2 | length 11.8
  Top Layer w1: L1.2 121.793,100.895 121.793,97.282
NetQ1_1: Q1.1 R2.1 | length 1.7
  Top Layer w0.3: Q1.1@139.507,86.53 R2.1@141.224,86.53
NetQ1_2: Q1.2 R1.2 | length 1.5
  Top Layer w0.3: R1.2@136.132,86.596 Q1.2
NetR3_1: R3.1 R4.2 U1.7 | length 7.3
  Top Layer w0.3: R4.2 R3.1 119.874,93.752 U1.7
NetR5_1: R5.1 U1.10 | length 2.2
  Top Layer w0.3: U1.10 R5.1@129.629,93.752
NRST: C69.2 K1.1 P12.5 R29.1 U4.7 | length 87.6
  Top Layer w0.3: U4.7 81.613,89.075 v1(81.915,88.773)
  Top Layer w0.5: v1(124.46,81.915) 129.54,81.915 129.986,81.469 C69.2 P12.5@140.335,80.645
  Top Layer w0.6: R29.1 134.786,71.132 K1.1
  Bottom Layer w0.3: v1(81.915,88.773) 84.963,85.725 120.65,85.725 v1(124.46,81.915)
  Bottom Layer w0.5: K1.1 141.966,68.687 143.256,69.977 143.256,77.724 P12.5
OUT1_1: P8.2 U7.11 | length 3.5
  Top Layer w0.3: U7.11 67.517,84.248 P8.2
OUT1_2: P8.1 U7.13 | length 3.5
  Top Layer w0.3: U7.13 67.387,85.548 P8.1
OUT2_1: P9.2 U8.11 | length 3.5
  Top Layer w0.3: U8.11 67.482,70.948 P9.2
OUT2_2: P9.1 U8.13 | length 3.6
  Top Layer w0.3: U8.13 67.422,72.248 P9.1
OUT3_1: P10.2 U9.11 | length 3.5
  Top Layer w0.3: U9.11 104.947,70.948 P10.2
OUT3_2: P10.1 U9.13 | length 3.6
  Top Layer w0.3: U9.13 104.887,72.248 P10.1
OUT4_1: P11.2 U10.11 | length 3.5
  Top Layer w0.3: U10.11 125.937,70.913 P11.2
OUT4_2: P11.1 U10.13 | length 3.5
  Top Layer w0.3: U10.13 125.807,72.213 P11.1
RCC_OSC_IN: C21.2 U4.5 Y1.1 | length 22
  Top Layer w0.3: Y1.1 63.686,95.885 68.453,95.885 v1(74.676,89.662) C21.2 ; v1@78.391,90.075 U4.5
  Bottom Layer w0.3: v1(74.676,89.662) 77.978,89.662 v1(78.359,90.043)
RCC_OSC_OUT: R28.2 U4.6 | length 3.7
  Top Layer w0.3: R28.2 77.458,87.745 79.288,89.575 U4.6
SWCLK: P12.3 U4.49 | length 61.1
  Top Layer w0.254: U4.49 90.675,93.85 v1(90.805,93.98) ; v1(113.03,93.853) 113.03,93.599 117.475,89.154 v1(117.475,88.9)
  Bottom Layer w0.254: v1(90.805,93.98) 90.974,93.811 112.988,93.811 v1(113.03,93.853) ; v1(117.475,88.9) 130.302,88.9 138.557,80.645 138.557,77.343 P12.3
SWDIO: P12.2 U4.46 | length 59.7
  Top Layer w0.254: U4.46 92.726,91.075 v1(92.837,91.186) ; v1(113.538,91.186) 113.538,91.059 v1(116.332,88.265)
  Bottom Layer w0.254: v1(92.837,91.186) v1(113.538,91.186) ; v1(116.332,88.265) 129.794,88.265 138.049,80.01 138.049,75.311 P12.2
USB_5V: C4.1 P1.1 U2.3 USB_5V.0 | length 50.2
  Top Layer w0.5: P1.1 146.147,86.33 147.193,87.376
  Top Layer w0.8: C4.1@107.595,86.525 110.758,89.688 U2.3 112.67,92.223 v2(112.776,92.329) ; v2(146.431,92.202) 146.431,90.424 147.193,89.662 147.193,87.376
  Bottom Layer w0.8: v2(112.776,92.329) v2@146.304,92.329
USB_ENABLE: R1.1 U4.43 | length 49
  Top Layer w0.3: v1@89.027,89.575 U4.43
  Top Layer w0.5: v1(128.905,87.122) 129.413,86.614 R1.1
  Bottom Layer w0.5: v1(89.027,89.535) 91.44,87.122 v1(128.905,87.122)
USB_OTG_FS_DM: P1.2 U4.44 | length 55.3
  Top Layer w0.254: U4.44 v1@94.107,90.075
  Top Layer w0.3: v1(143.51,86.868) 143.622,86.98 P1.2
  Bottom Layer w0.254: v1(94.107,90.043) 94.361,89.789 140.589,89.789 v1(143.51,86.868)
USB_OTG_FS_DP: P1.3 R2.2 U4.45 | length 55.8
  Top Layer w0.254: U4.45 v1@94.742,90.575 ; v1(139.446,90.551) 141.224,88.773 R2.2
  Top Layer w0.3: R2.2@141.224,87.63 P1.3
  Bottom Layer w0.254: v1(94.742,90.551) v1(139.446,90.551)
VDDA: C23.2 C24.2 L3.2 U4.13 | length 8.6
  Top Layer w0.3: C23.2 75.726,86.075 U4.13
  Top Layer w0.5: C23.2 C24.2 75.257,84.193 L3.2
pads on no net: K1.3 K1.4 P1.0 P1.4 P14.1 P14.4 P15.1 P15.4 P16.1 P16.4 P17.1 P17.4 U1.12 U1.16 U2.4 U4.2 U4.3 U4.4 U4.8 U4.9 U4.10 U4.11 U4.25 U4.33 U4.34 U4.35 U4.36 U4.61 U4.62 U7.10 U7.14 U8.10 U8.14 U9.10 U9.14 U10.10 U10.14

## Keep-outs
Keep-Out Layer:
  circle w0.254: c147.32,66.04 r1
  circle w0.254: c52.705,122.555 r1
  circle w0.254: c147.32,102.235 r1
  lines w0.254: 148.078,104.659 cw(c147.32,102.235) 149.86,102.235 149.86,66.04 cw(c147.32,66.04) 147.32,63.5 52.705,63.5 cw(c52.705,66.04) 50.165,66.04 50.165,122.555 cw(c52.705,122.555) 52.705,125.095 89.729,125.095 148.082,104.671

## Silkscreen, mask and mechanical layers (free items; w line width, h text height)
Top Overlay:
  text "RH_V2 / Shihan" at 126.619,102.616 h1.52
  text "-" at 142.748,97.155 h0.76
  text "+" at 142.748,94.742 h0.76
  text "NRST" at 135.382,80.264 h0.76
  text "DGND" at 135.382,77.724 h0.76
  text "SWCLK" at 135.382,75.819 h0.76
  text "SWDIO" at 135.255,72.771 h0.76
  text "VCC" at 70.612,69.85 h0.76
  text "VCC" at 139.827,67.564 h0.76

## Text inside footprints (layer, text, board x,y; h text height)
P14: Top Overlay "9" at 89.789,117.221 h0.76; Top Overlay "1" at 98.298,117.221 h0.76
P15: Top Overlay "9" at 77.089,117.221 h0.76; Top Overlay "1" at 85.598,117.221 h0.76
P16: Top Overlay "9" at 64.262,117.221 h0.76; Top Overlay "1" at 72.771,117.221 h0.76
P17: Top Overlay "9" at 51.689,117.221 h0.76; Top Overlay "1" at 60.198,117.221 h0.76